# Altium PCB AP2-H.PcbDoc (part 2 of 4)
Units mm, origin at the board's own origin, x right, y up, seen from the top; angles counter-clockwise.
Board outline 380 x 190 mm, 2 copper layers (Top Layer, Bottom Layer); 519 components, 519 nets, 1666 pads, 438 vias.
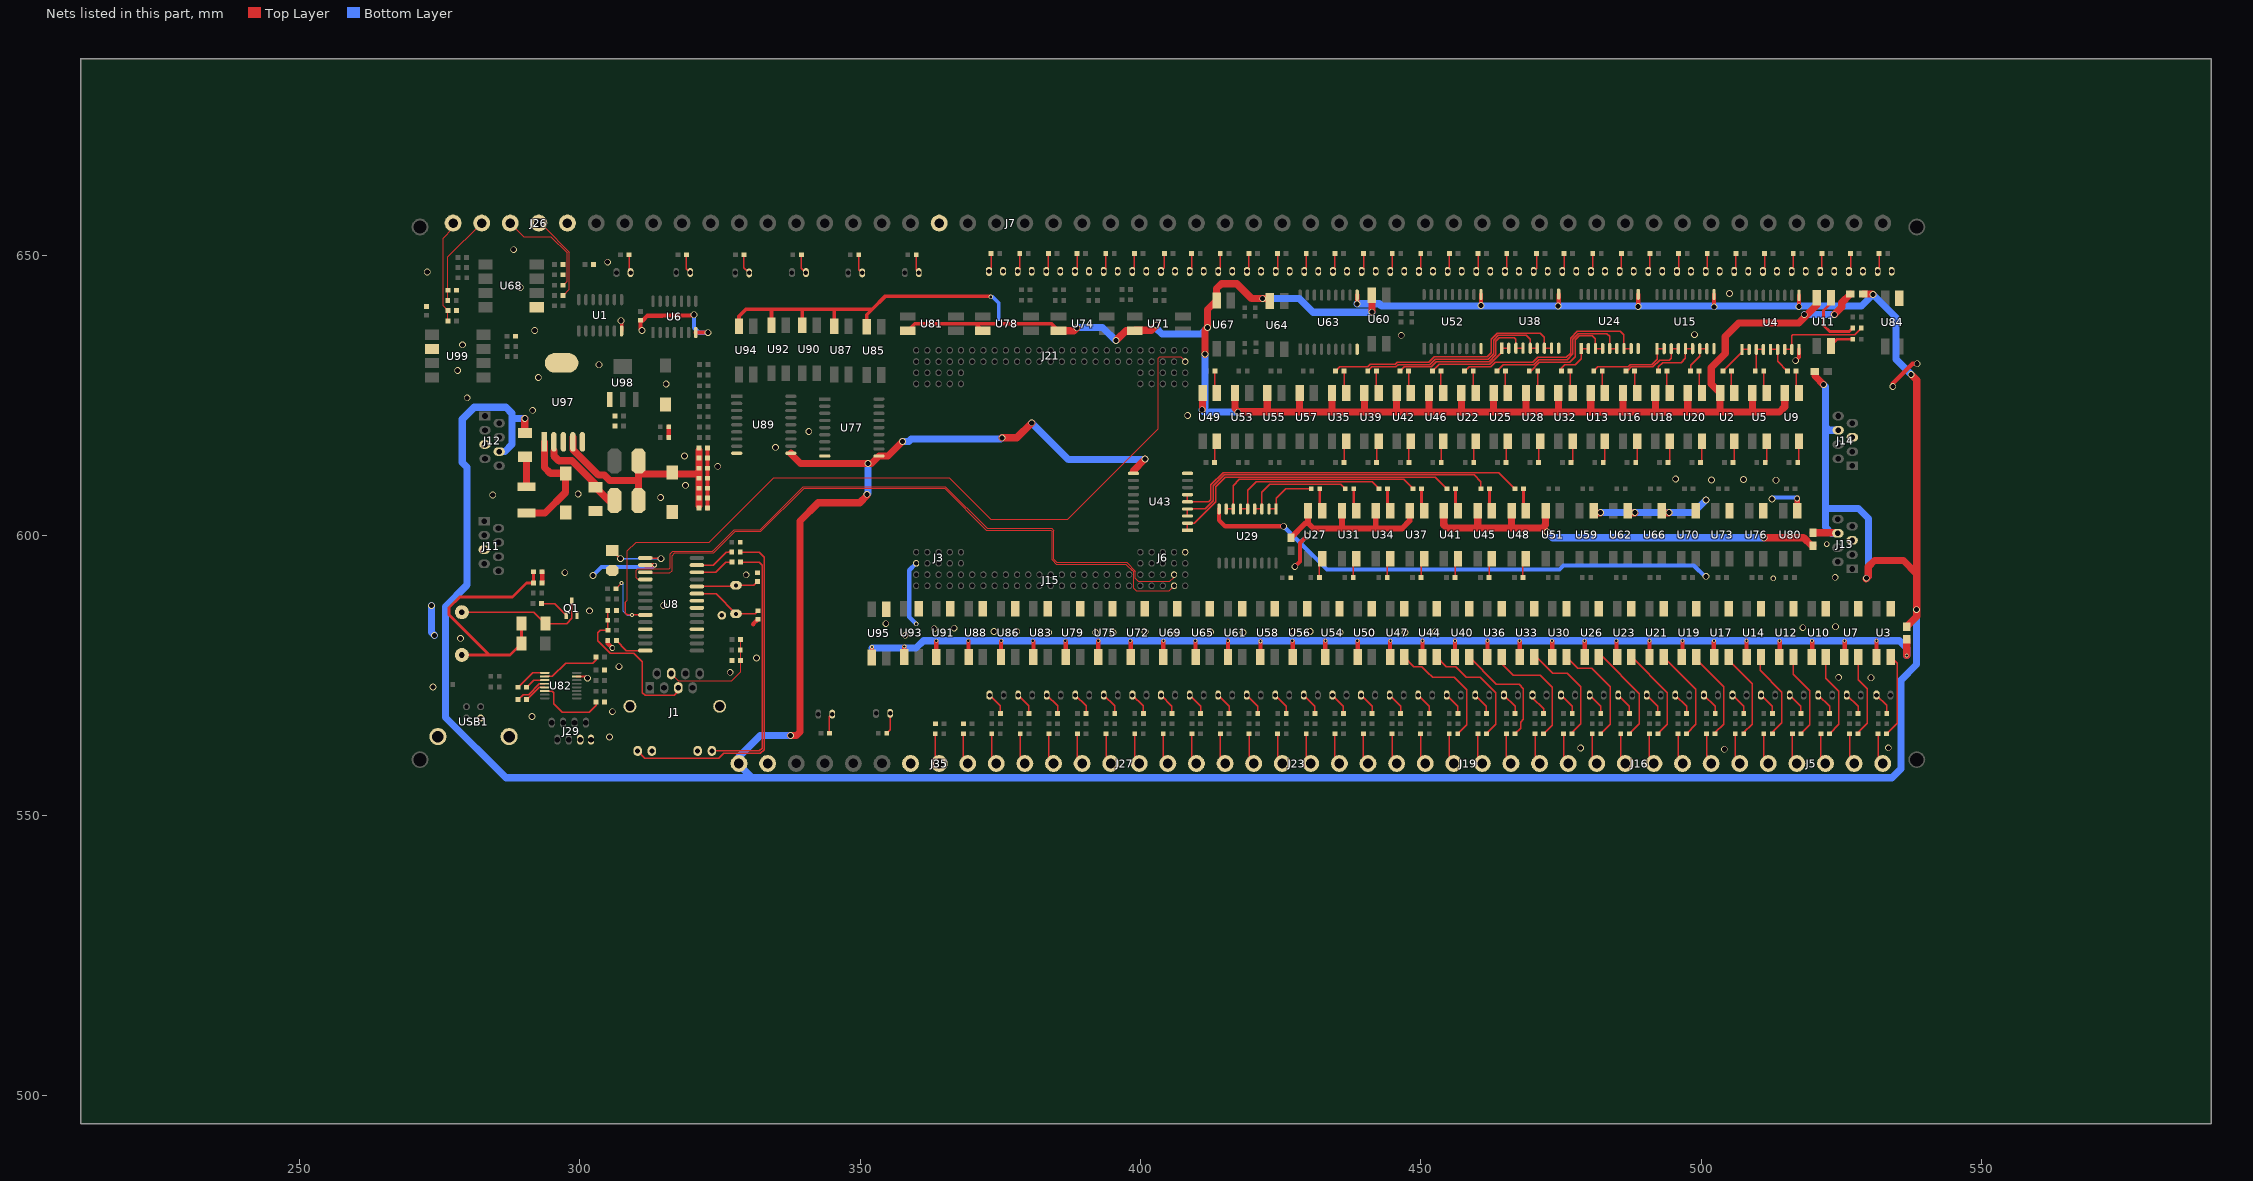
[diagram p2: the nets of this part, all layers, seen from the top]

## Via types
v1: diameter 0.7, hole 0.4, Top Layer to Bottom Layer, 204 vias
v2: diameter 1.2, hole 0.9, Top Layer to Bottom Layer, 160 vias
v3: diameter 1, hole 0.7, Top Layer to Bottom Layer, 38 vias
v4: diameter 0.8, hole 0.5, Top Layer to Bottom Layer, 14 vias
v5: diameter 3.556, hole 3.556, Top Layer to Bottom Layer, 10 vias
v6: diameter 2.3, hole 1.7, Top Layer to Bottom Layer, 8 vias
v7: diameter 1.1, hole 0.8, Top Layer to Bottom Layer, 2 vias
v8: diameter 2.8, hole 2.8, Top Layer to Bottom Layer, 2 vias

## Nets (pads, with @x,y where several pads share a name; then routed paths per layer and width w, separated by ;. In a path a pad name is that pad's centre, name@x,y a point inside that pad or via, vN(x,y) a via of type N, cw(c..) or ccw(c..) an arc to the next point about the centre after c; other vN are vias at no path point) (continued)
+24V: D4.A J12.6 J13.6 J14.6 J33.2 R5.2 R6.2 R100.2 R144.2 U4.10 U15.10 U24.10 U38.10 U43.10 U52.10 U63.10 U77.10 U89.10 | length 759.8
  Top Layer w0.762: v2@438.66,641.301 U63.10@438.66,642.85 ; v2(460.76,640.99) U52.10@460.76,642.95 ; v2@474.599,640.842 U38.10@474.599,643.024 ; v2(488.798,640.817) U24.10@488.798,642.974 ; U15.10@502.31,642.948 502.31,640.766 v2(502.336,640.766) ; v2(517.449,640.791) 517.474,640.766 U4.10@517.474,642.821
  Top Layer w1.27: D4.A@290.195,618.324 v2(290.195,620.827) ; v2(337.617,564.312) 338.658,564.312 339.293,564.947 339.293,602.564 342.546,605.817 349.953,605.817 351.231,607.095 v2(351.231,607.314) ; U89.10@337.65,614.64 337.617,614.607 339.39,612.833 v2(351.409,612.833) 352.043,612.833 U77.10@353.35,614.14 354.984,614.14 v2(357.579,616.735) ; v2(375.336,617.398) 377.952,617.398 v2(380.619,620.065) ; 398.898,611.378 398.75,611.526 v2(400.837,613.613) ; R100.2@519.963,600.456 524.307,600.456 J13.6@524.408,600.354 ; R144.2@520.319,629.209 520.319,628.421 v2(521.868,626.872) ; R5.2@528.93,643.026 530.606,643.026 v2(530.657,642.976) ; v2@529.438,592.261 529.826,592.65 529.826,594.393 530.962,595.528 536.092,595.528 538.48,593.141 ; R6.2@536.702,583.717 538.48,585.495 538.48,593.141 ; v2@537.667,628.523 538.48,627.71 538.48,593.141
  Bottom Layer w1.27: J12.6@285.623,614.934 286.639,614.934 287.884,616.179 287.884,620.827 ; v2(290.195,620.827) 287.884,620.827 ; v2@337.617,564.286 332.181,564.286 328.4,560.505 J33.2@328.4,559.3 328.4,559.076 330.708,556.768 ; v2(351.231,607.314) 351.409,607.492 v2(351.409,612.833) ; v2(357.579,616.735) 358.707,616.735 359.131,617.159 375.097,617.159 v2(375.336,617.398) ; v2(380.619,620.065) 387.186,613.498 v2@400.787,613.498 ; v2(438.658,641.299) 442.595,641.299 442.976,640.918 v2(474.523,640.918) 528.599,640.918 v2(530.657,642.976) 534.772,638.861 534.772,631.393 v2@537.312,628.853 ; v2(521.868,626.872) 522.173,626.567 522.173,619.404 ; J13.6@524.408,600.354 523.291,600.354 522.173,601.472 522.173,604.774 ; J14.6@524.459,618.744 522.834,618.744 522.173,619.404 ; v2(529.488,592.353) 529.869,592.734 529.869,603.021 528.117,604.774 522.173,604.774 ; v2(538.429,586.74) 538.455,586.715 538.455,576.936 535.661,574.142 535.661,558.368 534.06,556.768 330.708,556.768 ; 287.884,620.827 287.884,621.792 286.835,622.841 281.186,622.841 279.044,620.7 279.044,612.978 279.857,612.165 279.857,591.109 276.073,587.324 276.073,567.512 286.817,556.768 330.708,556.768 ; 522.173,604.774 522.173,619.404
  other v2: 537.489,628.675
CAN_H: C37.2 CAN.1 R270.1 | length 16.2
  Top Layer w0.16: R270.1@276.479,641.909 C37.2@276.479,643.712 276.479,649.656 CAN.1@282.473,655.65
CAN_L: C36.2 CAN.2 R269.1 | length 18.4
  Top Layer w0.16: R269.1@276.479,638.277 C36.2@276.479,640.08 275.641,640.918 275.641,653.009 277.373,654.741 CAN.2@277.373,655.65
CLKOUT: J15.48 U8.3 | length 115.5
  Top Layer w0.16: U8.3@311.7,593.415 311.819,593.296 316.078,593.296 316.491,593.71 316.491,596.392 316.965,596.866 323.849,596.866 323.874,596.89 323.907,596.89 327.722,600.705 332.325,600.705 340.002,608.382 365.073,608.382 372.537,600.918 384.052,600.918 384.246,600.724 384.246,595.619 384.985,594.88 397.396,594.88 398.805,593.471 ; 398.313,593.964 398.805,593.471 ; J15.48@406,591 405.123,590.123 399.258,590.123 398.805,590.575 398.805,593.471
CS: J21.50 R33.2 U8.9 | length 151.1
  Top Layer w0.16: R33.2@306.476,590.474 307.442,591.439 v1(307.442,591.49) ; 308.153,588.053 308.483,588.383 308.483,597.212 310.057,598.786 323.054,598.786 323.078,598.81 323.112,598.81 334.604,610.302 365.868,610.302 373.332,602.838 387.003,602.838 403.2,619.035 403.2,631.546 403.494,631.84 406.327,631.84 407.16,631.84 J21.50@408,631 J21.50@408,630.976
  Top Layer w0.254: 308.153,588.053 308.153,586.147 308.505,585.795 U8.9@311.7,585.795
  Bottom Layer w0.16: v1(307.442,591.49) 307.746,591.185 307.746,586.486 308.458,585.775 309.321,585.775 v1(309.296,585.8)
E+5V: C18.2 C19.2 C20.2 C21.2 C22.2 C23.2 C24.2 C32.1 L1.2 L2.1 U97.4 | length 43.5
  Top Layer w1.27: U97.4@298.76,616.682 U97.4@298.76,617.53 ; U97.4@298.78,616.682 298.78,615.264 303.309,610.736 304.375,610.736 305.333,609.778 310.5,609.778 ; L2.1@310.5,606.258 310.5,609.778 ; L1.2@310.5,613.248 310.5,609.778 ; 311.187,610.919 316.488,610.919 320.764,610.919 321.264,611.419 ; C18.2@321.264,605.231 321.264,607.719 321.264,609.619 321.264,611.419 ; C24.2@321.264,615.219 321.264,613.319 321.264,611.419
GND: C1.2 C2.2 C3.2 C4.2 C5.2 C6.2 C7.2 C8.1 C9.2 C12.2 C14.2 C15.2 C18.1 C19.1 C20.1 C21.1 C22.1 C23.1 C24.1 C25.2 C26.2 C27.2 C28.2 C29.2 C30.2 C31.2 C32.2 C33.2 C34.2 C36.1 C37.1 D3.A J1.10 J1.11 J1.13 J3.2 J6.9 J7.6 J11.5 J12.5 J13.5 J14.5 J26.3 J29.6 J29.8 J33.1 J35.1 LED7.K LED8.K LED9.K LED10.K LED11.K LED12.K LED13.K LED14.K LED21.K LED22.K LED23.K LED24.K LED25.K LED26.K LED27.K LED28.K LED35.K LED36.K LED37.K LED38.K LED45.K LED46.K LED47.K LED48.K LED55.K LED56.K LED57.K LED58.K LED59.K LED60.K LED61.K LED62.K pad.0 Q1.2 R40.2 R170.2 R265.2 R266.2 R271.2 U1.7 U3.3 U4.9 U6.7 U7.3 U8.2 U8.11 U8.18 U8.21 U8.22 U10.3 U12.3 U14.3 U15.9 U17.3 U19.3 U21.3 U23.3 U24.9 U26.3 U29.9 U30.3 U33.3 U36.3 U38.9 U40.3 U43.9 U44.3 U47.3 U50.3 U52.9 U54.3 U56.3 U58.3 U59.3 U61.3 U62.3 U63.9 U65.3 U66.3 U68.5 U69.3 U70.3 U72.3 U73.3 U75.3 U76.3 U77.9 U79.3 U80.3 U82.15 U83.3 U84.3 U86.3 U88.3 U89.9 U91.3 U93.3 U95.3 U97.3 U97.5 U97.6 U98.1 U99.2 USB1.4 USB1.5 USB1.6 | length 212.3
  Top Layer w0.203: J7.6@364.033,655.633 J7.6@364.1,655.7
  Top Layer w0.254: J35.1@358.37,559.93 J35.1@359,559.3
  Top Layer w0.381: U82.15@299.45,574.825 301.069,574.825 v2(301.371,574.523)
  Top Layer w0.635: v2(307.34,638.277) 307.453,638.163 U1.7@307.453,636.457 ; v2(516.89,631.165) 517.474,631.749 U4.9@517.474,633.171 ; U80.3@517.144,604.443 U80.3@517.187,604.4
  Top Layer w0.762: C14.2@293.294,591.515 C15.2@293.294,593.515 ; R40.2@305,581.25 305,580.723 v3(305.816,579.907) ; v2(311.099,636.524) 310.82,636.803 C1.2@310.82,638.378 311.277,638.378 312.101,639.202 312.115,639.189 314.706,639.189 314.719,639.202 v2@320.396,639.202 ; U8.2@311.7,594.685 v4(313.355,594.685) ; C27.2@315.874,617.468 C28.2@315.874,619.368 ; U6.7@320.687,636.177 322.85,636.177 v2(322.885,636.143) ; C18.1@322.788,604.85 322.788,607.719 322.788,609.619 322.788,611.419 322.788,613.319 C24.1@322.788,615.219 ; 330.924,584.162 C7.2@331.8,585.038 ; U29.9@414.04,604.7 414.04,602.697 415.112,601.624 v2(425.552,601.624) ; v2(427.543,594.421) 428.473,595.351 428.473,598.627 v2(429.743,599.897) ; v2(534.213,626.542) 534.213,627.086 537.733,630.606 v2(538.556,630.606)
  Top Layer w1.016: U80.3@517.144,604.443 v3(517.144,606.577)
  Top Layer w1.27: U59.3@480.867,604.4 481.255,604.012 v2@482.099,604.012 ; U62.3@486.92,604.4 487.359,603.961 v2@488.188,603.961 ; U66.3@493.59,604.012 v2@494.284,604.012
  Bottom Layer w0.762: v2(302.362,592.836) 303.886,594.36 313.03,594.36 v4(313.355,594.685) ; v2(320.396,639.343) 320.396,637.032 321.285,636.143 v2(322.885,636.143) ; J3.2@360,595 358.775,593.775 358.775,585.445 v4(360.02,584.2) ; v2(425.552,601.624) 428.498,598.678 ; v2(429.743,599.897) 428.523,598.678 428.498,598.678 ; v2@500.774,592.569 498.704,594.639 475.488,594.639 474.751,593.903 433.273,593.903 428.498,598.678 ; v2@512.724,606.74 516.981,606.74 v3(517.144,606.577)
  Bottom Layer w1.27: v2(273.558,587.451) 273.558,582.676 v2(274.066,582.168) ; v2(482.099,604.063) v2(488.188,604.063) 498.627,604.063 v2(500.888,606.323)
  other v2: 504.165,561.848 478.536,562.051 533.4,562.102 305.308,564.032 291.465,567.69 305.816,568.554 273.812,572.948 530.301,574.599 524.561,574.675 326.822,575.564 306.984,576.58 331.521,578.104 278.74,581.635 358.038,582.168 383.642,582.676 392.024,582.676 395.122,582.676 418.287,582.676 435.585,582.676 441.198,582.676 447.192,582.676 406.4,582.727 412.496,582.778 400.812,582.803 452.628,582.803 373.888,582.828 377.952,582.828 427.228,582.828 430.276,582.828 363.22,583.336 366.776,583.438 518.16,583.54 523.977,583.692 354.584,584.251 301.752,586.537 314.96,587.502 523.926,592.506 500.888,592.684 329.692,592.963 297.332,593.344 494.309,604.063 512.648,606.476 314.427,606.755 284.48,607.187 299.72,607.365 318.846,608.914 513.359,609.829 501.853,609.879 507.568,609.956 495.478,610.057 324.612,612.318 318.694,614.172 334.924,615.696 340.868,618.541 408.432,621.36 291.592,622.3 279.908,624.535 315.417,626.999 292.608,628.142 278.232,629.412 303.428,630.428 279.07,633.984 446.532,635.686 498.856,635.787 291.973,636.524 505.079,643.128 289.408,644.195 272.796,646.989 304.978,648.716 288.214,650.951
  other v3: 512.877,592.328 522.427,598.424
INPUT1: J5.1 R9.2 | length 5.6
  Top Layer w0.254: R9.2@531.576,564.6 531.576,560.124 J5.1@532.4,559.3
INPUT2: J5.2 R13.2 | length 5.6
  Top Layer w0.254: R13.2@526.499,564.6 526.499,560.101 J5.2@527.3,559.3
INPUT3: J5.3 R29.2 | length 5.6
  Top Layer w0.254: R29.2@521.398,564.6 521.398,560.102 J5.3@522.2,559.3
INPUT4: J5.4 R34.2 | length 5.6
  Top Layer w0.254: R34.2@516.298,564.6 516.298,560.102 J5.4@517.1,559.3
INPUT5: J5.5 R39.2 | length 5.6
  Top Layer w0.254: R39.2@511.197,564.6 511.197,560.103 J5.5@512,559.3
INPUT6: J5.6 R44.2 | length 5.6
  Top Layer w0.254: R44.2@506.096,564.6 506.096,560.104 J5.6@506.9,559.3
INPUT7: J16.1 R52.2 | length 5.6
  Top Layer w0.254: R52.2@500.995,564.6 500.995,560.105 J16.1@501.8,559.3
INPUT8: J16.2 R56.2 | length 5.6
  Top Layer w0.254: R56.2@495.895,564.6 495.895,560.105 J16.2@496.7,559.3
INPUT9: J16.3 R66.2 | length 5.6
  Top Layer w0.254: R66.2@490.794,564.6 490.794,560.106 J16.3@491.6,559.3
INPUT10: J16.4 R70.2 | length 5.6
  Top Layer w0.254: R70.2@485.693,564.6 485.693,560.107 J16.4@486.5,559.3
INPUT11: J16.5 R81.2 | length 5.6
  Top Layer w0.254: R81.2@480.592,564.6 480.592,560.108 J16.5@481.4,559.3
INPUT12: J16.6 R87.2 | length 5.6
  Top Layer w0.254: R87.2@475.491,564.6 475.491,560.109 J16.6@476.3,559.3
INPUT13: J19.1 R93.2 | length 5.6
  Top Layer w0.254: R93.2@470.391,564.6 470.391,560.109 J19.1@471.2,559.3
INPUT14: J19.2 R99.2 | length 5.6
  Top Layer w0.254: R99.2@465.29,564.6 465.29,560.11 J19.2@466.1,559.3
INPUT15: J19.3 R110.2 | length 5.6
  Top Layer w0.254: R110.2@460.189,564.6 460.189,560.111 J19.3@461,559.3
INPUT16: J19.4 R122.2 | length 5.6
  Top Layer w0.254: R122.2@455.088,564.6 455.088,560.112 J19.4@455.9,559.3
INPUT17: J19.5 R128.2 | length 5.6
  Top Layer w0.254: R128.2@449.988,564.6 449.988,560.112 J19.5@450.8,559.3
INPUT18: J19.6 R134.2 | length 5.6
  Top Layer w0.254: R134.2@444.887,564.6 444.887,560.113 J19.6@445.7,559.3
INPUT19: J23.1 R142.2 | length 5.6
  Top Layer w0.254: R142.2@439.786,564.6 439.786,560.114 J23.1@440.6,559.3
INPUT20: J23.2 R147.2 | length 5.6
  Top Layer w0.254: R147.2@434.685,564.6 434.685,560.115 J23.2@435.5,559.3
INPUT21: J23.3 R159.2 | length 5.6
  Top Layer w0.254: R159.2@429.584,564.6 429.584,560.116 J23.3@430.4,559.3
INPUT22: J23.4 R165.2 | length 5.6
  Top Layer w0.254: R165.2@424.484,564.6 424.484,560.116 J23.4@425.3,559.3
INPUT23: J23.5 R177.2 | length 5.6
  Top Layer w0.254: R177.2@419.383,564.6 419.383,560.117 J23.5@420.2,559.3
INPUT24: J23.6 R188.2 | length 5.6
  Top Layer w0.254: R188.2@414.282,564.6 414.282,560.118 J23.6@415.1,559.3
INPUT25: J27.1 R194.2 | length 5.6
  Top Layer w0.254: R194.2@409.181,564.6 409.181,560.119 J27.1@410,559.3
INPUT26: J27.2 R200.2 | length 5.6
  Top Layer w0.254: R200.2@404.081,564.6 404.081,560.119 J27.2@404.9,559.3
INPUT27: J27.3 R216.2 | length 5.6
  Top Layer w0.254: R216.2@398.98,564.6 398.98,560.12 J27.3@399.8,559.3
INPUT28: J27.4 R224.2 | length 5.6
  Top Layer w0.254: R224.2@393.879,564.6 393.879,560.121 J27.4@394.7,559.3
INPUT29: J27.5 R228.2 | length 5.6
  Top Layer w0.254: R228.2@388.778,564.6 388.778,560.122 J27.5@389.6,559.3
INPUT30: J27.6 R232.2 | length 5.6
  Top Layer w0.254: R232.2@383.678,564.6 383.678,560.122 J27.6@384.5,559.3
INPUT31: J31.1 R240.2 | length 5.6
  Top Layer w0.254: R240.2@378.577,564.6 378.577,560.123 J31.1@379.4,559.3
INPUT32: J31.2 R246.2 | length 5.6
  Top Layer w0.254: R246.2@373.476,564.6 373.476,560.124 J31.2@374.3,559.3
INT: J15.47 U8.4 | length 118.1
  Top Layer w0.16: U8.4@311.7,592.145 310.343,592.145 310.083,592.405 310.083,593.801 310.312,594.03 315.976,594.03 316.171,594.225 316.171,596.736 316.62,597.186 323.716,597.186 323.741,597.21 323.775,597.21 327.589,601.025 332.185,601.025 332.188,601.027 ; 332.195,601.027 339.87,608.702 365.205,608.702 372.669,601.238 384.185,601.238 384.566,600.857 384.566,595.751 385.118,595.2 397.529,595.2 399.125,593.604 399.125,592.328 399.613,591.84 405.277,591.84 406,592.563 J15.47@406,593
LEDA: J1.9 R21.2 | length 62.9
  Top Layer w0.254: J1.9@310.325,561.55 311.627,560.248 324.83,560.248 325.7,561.118 332.229,561.118 332.867,561.756 332.867,561.782 332.933,561.848 332.933,596.093 331.999,597.027 328.878,597.027 R21.2@328.624,597.281
LEDB: J1.12 R22.2 | length 46
  Top Layer w0.254: J1.12@323.574,561.55 332.05,561.55 332.519,562.019 332.519,594.683 331.978,595.224 328.802,595.224 R22.2@328.624,595.401
NetC2_1: C2.1 J1.4 R1.1 R2.2 | length 20
  Top Layer w0.16: J1.4@316.31,575.34 317.594,574.056 327.092,574.056 328.7,575.664 C2.1@328.7,577.647 R1.1@328.7,581.447
  Top Layer w0.254: J1.4@316.31,575.34 J1.4@316.803,575.34 ; R2.2@328.624,579.547 R2.2@328.7,579.623
NetC3_1: C3.1 J1.5 R3.1 R4.2 | length 29.6
  Top Layer w0.254: C3.1@305,586.7 305,584.9 305.024,584.876 R3.1@305.024,583.075 303.675,583.075 303.2,582.6 303.2,581.209 305.409,579 309.6,579 311.151,577.449 311.151,571.965 311.656,571.461 316.821,571.461 317.58,572.22 J1.5@317.58,572.8
NetC5_1: C5.1 U8.1 | length 11.9
  Top Layer w0.254: C5.1@305.8,597.281 307.248,595.833 v2(307.264,595.833) ; U8.1@311.7,595.955 v2@314.356,595.955
  Bottom Layer w0.254: v2(307.264,595.833) v2(314.477,595.833)
NetC6_1: C6.1 U8.24 Y1.2 | length 11.2
  Top Layer w0.254: U8.24@320.9,590.875 327.604,590.875 327.863,591.134 331.064,591.134 C6.1@331.724,591.795
NetC7_1: C7.1 U8.23 Y1.1 | length 12.6
  Top Layer w0.254: U8.23@320.9,589.605 324.312,589.605 327.863,586.054 331.292,586.054 C7.1@331.8,586.562
NetC9_1: C9.1 U82.6 | length 13
  Top Layer w0.254: U82.6@293.75,572.225 295.075,572.225 295.357,571.943 295.357,569.943 296.848,568.452 301.676,568.452 302.9,569.676 C9.1@302.9,570.3
NetC10_1: C10.1 U82.5 | length 4
  Top Layer w0.254: C10.1@290.5,571 290.9,571 292.775,572.875 U82.5@293.75,572.875
NetC10_2: C10.2 U82.4 | length 5.9
  Top Layer w0.254: C10.2@288.976,570.7 289.876,571.6 290.889,571.6 292.814,573.525 U82.4@293.75,573.525
NetC11_1: C11.1 U82.2 | length 10.9
  Top Layer w0.254: U82.2@293.75,574.825 295.095,574.825 297.459,577.19 302.29,577.19 302.9,577.8 C11.1@302.9,578.283
NetC13_1: C13.1 U82.1 | length 5.8
  Top Layer w0.254: C13.1@289,572.9 291.575,575.475 U82.1@293.75,575.475
NetC13_2: C13.2 U82.3 | length 3.8
  Top Layer w0.254: C13.2@290.524,572.9 291.799,574.175 U82.3@293.75,574.175
NetC14_1: C14.1 C15.1 D1.K D2.K U96.2 | length 45.4
  Top Layer w0.508: U96.2@278.968,578.663 283.845,578.663 ; D2.K@289.615,584.252 289.615,580.696 D1.K@289.59,580.671 287.582,578.663 283.845,578.663 ; C15.1@291.77,593.515 C14.1@291.77,591.515 290.5,591.515 288.011,589.026 278.587,589.026 276.669,587.108 276.669,585.839 283.845,578.663
NetC34_1: C34.1 F1.2 U97.1 | length 20.7
  Top Layer w1.27: F1.2@290.474,603.987 293.776,603.987 297.485,607.695 C34.1@297.485,611.068 294.747,611.068 293.7,612.115 U97.1@293.7,616.682
NetD2_A: D2.A Q1.3 U96.1 | length 23.9
  Top Layer w0.254: U96.1@279.298,586.283 291.835,586.283 D2.A@293.865,584.252 297.638,584.252 298.577,585.191 Q1.3@298.577,588.289
  Top Layer w0.508: U96.1@278.968,586.283 U96.1@279.298,586.283
NetD3_K: D3.K L2.2 U97.2 | length 15.3
  Top Layer w1.27: U97.2@295.373,615.087 295.373,614.201 296.262,613.312 298.615,613.312 302.805,609.122 D3.K@302.805,608.578 305.175,606.208 L2.2@306.16,606.208
NetD4_K: D4.K F1.1 | length 5.4
  Top Layer w1.27: D4.K@290.245,614.024 290.474,613.794 F1.1@290.474,608.686
NetJ26_1: J26.1 R180.2 | length 18.8
  Top Layer w0.16: R180.2@296.732,644.601 R180.2@297.053,644.601
  Top Layer w0.203: J26.1@287.602,655.702 290.015,653.288 294.869,653.288 297.764,650.392 297.764,645.312 R180.2@297.053,644.601
NetJ26_2: J26.2 R184.2 | length 16.4
  Top Layer w0.203: J26.2@292.6,655.6 292.6,654.953 293.718,654.953 298.163,650.507 298.163,643.908 R184.2@297.028,642.772
  Top Layer w0.254: R184.2@297.104,642.772 R184.2@297.205,642.671
NetJ35_2: J35.2 R262.1 | length 5.6
  Top Layer w0.254: R262.1@363.406,564.6 363.406,559.994 J35.2@364.1,559.3
NetJ35_3: J35.3 R263.1 | length 5.6
  Top Layer w0.254: R263.1@368.441,564.6 368.441,560.059 J35.3@369.2,559.3
NetLED1_A: LED1.A R15.2 | length 4.1
  Top Layer w0.254: LED1.A@531.3,571.5 533.124,569.676 R15.2@533.124,568.2
NetLED2_A: LED2.A R16.2 | length 4.1
  Top Layer w0.254: LED2.A@526,571.5 528.024,569.476 R16.2@528.024,568.2
NetLED3_A: LED3.A R17.2 | length 4.1
  Top Layer w0.254: LED3.A@520.906,571.5 522.924,569.482 R17.2@522.924,568.2
NetLED4_A: LED4.A R18.2 | length 4.1
  Top Layer w0.254: LED4.A@515.81,571.5 517.824,569.486 R18.2@517.824,568.2
NetLED5_A: LED5.A R19.2 | length 4.1
  Top Layer w0.254: LED5.A@510.713,571.5 512.724,569.489 R19.2@512.724,568.2
NetLED6_A: LED6.A R20.2 | length 4.1
  Top Layer w0.254: LED6.A@505.616,571.5 507.624,569.492 R20.2@507.624,568.2
NetLED7_A: LED7.A R25.2 | length 3.3
  Top Layer w0.254: LED7.A@531.5,647.1 531.776,647.376 R25.2@531.776,650.3
NetLED8_A: LED8.A R26.2 | length 3.3
  Top Layer w0.254: LED8.A@526.387,647.1 526.666,647.379 R26.2@526.666,650.3
NetLED9_A: LED9.A R27.2 | length 3.3
  Top Layer w0.254: LED9.A@521.274,647.1 521.557,647.382 R27.2@521.557,650.3
NetLED10_A: LED10.A R28.2 | length 3.3
  Top Layer w0.254: LED10.A@516.161,647.1 516.447,647.386 R28.2@516.447,650.3
NetLED11_A: LED11.A R46.2 | length 3.3
  Top Layer w0.254: LED11.A@511.048,647.1 511.337,647.389 R46.2@511.337,650.3
NetLED12_A: LED12.A R47.2 | length 3.3
  Top Layer w0.254: LED12.A@505.935,647.1 506.228,647.392 R47.2@506.228,650.3
NetLED13_A: LED13.A R48.2 | length 3.7
  Top Layer w0.254: LED13.A@500.823,647.1 501.118,647.395 R48.2@501.118,650.3 R48.2@500.823,650.005
NetLED14_A: LED14.A R49.2 | length 3.3
  Top Layer w0.254: R49.2@495.71,650.001 R49.2@496.008,650.3 LED14.A@496.008,647.399
NetLED15_A: LED15.A R58.2 | length 4.1
  Top Layer w0.254: LED15.A@500.519,571.5 502.524,569.495 R58.2@502.524,568.2
NetLED16_A: LED16.A R59.2 | length 4.1
  Top Layer w0.254: LED16.A@495.423,571.5 497.424,569.499 R59.2@497.424,568.2
NetLED17_A: LED17.A R60.2 | length 4.1
  Top Layer w0.254: LED17.A@490.326,571.5 492.324,569.502 R60.2@492.324,568.2
NetLED18_A: LED18.A R61.2 | length 4.1
  Top Layer w0.254: LED18.A@485.229,571.5 487.224,569.505 R61.2@487.224,568.2
NetLED19_A: LED19.A R62.2 | length 4.1
  Top Layer w0.254: LED19.A@480.132,571.5 482.124,569.508 R62.2@482.124,568.2
NetLED20_A: LED20.A R63.2 | length 4.1
  Top Layer w0.254: LED20.A@475.035,571.5 477.024,569.511 R63.2@477.024,568.2
NetLED21_A: LED21.A R75.2 | length 3.8
  Top Layer w0.254: LED21.A@490.597,647.1 490.899,647.402 R75.2@490.899,650.3 R75.2@490.597,649.998
NetLED22_A: LED22.A R76.2 | length 3.8
  Top Layer w0.254: LED22.A@485.484,647.1 485.789,647.405 R76.2@485.789,650.3 R76.2@485.484,649.995
NetLED23_A: LED23.A R77.2 | length 3.3
  Top Layer w0.254: LED23.A@480.371,647.1 480.679,647.408 R77.2@480.679,650.3
NetLED24_A: LED24.A R78.2 | length 3.3
  Top Layer w0.254: LED24.A@475.258,647.1 475.57,647.411 R78.2@475.57,650.3
NetLED25_A: LED25.A R107.2 | length 3.3
  Top Layer w0.254: LED25.A@454.806,647.1 455.131,647.424 R107.2@455.131,650.3
NetLED26_A: LED26.A R104.2 | length 3.4
  Top Layer w0.254: LED26.A@470.145,647.1 470.676,647.631 R104.2@470.676,650.3
NetLED27_A: LED27.A R105.2 | length 3.3
  Top Layer w0.254: LED27.A@465.032,647.1 465.35,647.418 R105.2@465.35,650.3
NetLED28_A: LED28.A R106.2 | length 3.3
  Top Layer w0.254: LED28.A@459.919,647.1 460.241,647.421 R106.2@460.241,650.3
NetLED29_A: LED29.A R111.2 | length 4.1
  Top Layer w0.254: LED29.A@469.939,571.5 469.939,571.061 471.924,569.076 R111.2@471.924,568.2
NetLED30_A: LED30.A R112.2 | length 4.1
  Top Layer w0.254: LED30.A@464.842,571.5 466.824,569.518 R112.2@466.824,568.2
NetLED31_A: LED31.A R114.2 | length 4.1
  Top Layer w0.254: LED31.A@454.648,571.5 456.624,569.524 R114.2@456.624,568.2
NetLED32_A: LED32.A R113.2 | length 4.1
  Top Layer w0.254: LED32.A@459.745,571.5 461.724,569.521 R113.2@461.724,568.2
NetLED33_A: LED33.A R115.2 | length 4.1
  Top Layer w0.254: LED33.A@449.552,571.5 451.524,569.528 R115.2@451.524,568.2
NetLED34_A: LED34.A R116.2 | length 4.1
  Top Layer w0.254: LED34.A@444.455,571.5 446.424,569.531 R116.2@446.424,568.2
NetLED35_A: LED35.A R139.2 | length 3.3
  Top Layer w0.254: LED35.A@434.355,647.1 434.692,647.437 R139.2@434.692,650.3
NetLED36_A: LED36.A R136.2 | length 3.3
  Top Layer w0.254: LED36.A@449.694,647.1 450.021,647.428 R136.2@450.021,650.3
NetLED37_A: LED37.A R137.2 | length 2.9
  Top Layer w0.254: LED37.A@444.911,647.431 R137.2@444.911,650.3
NetLED38_A: LED38.A R138.2 | length 3.3
  Top Layer w0.254: LED38.A@439.468,647.1 439.802,647.434 R138.2@439.802,650.3
NetLED39_A: LED39.A R151.2 | length 4.1
  Top Layer w0.254: LED39.A@439.358,571.5 441.324,569.534 R151.2@441.324,568.2
NetLED40_A: LED40.A R152.2 | length 4.1
  Top Layer w0.254: LED40.A@434.261,571.5 436.224,569.537 R152.2@436.224,568.2
NetLED41_A: LED41.A R153.2 | length 4.1
  Top Layer w0.254: LED41.A@429.165,571.5 431.124,569.541 R153.2@431.124,568.2
NetLED42_A: LED42.A R154.2 | length 4.1
  Top Layer w0.254: LED42.A@424.068,571.5 426.024,569.544 R154.2@426.024,568.2
NetLED43_A: LED43.A R155.2 | length 4.1
  Top Layer w0.254: LED43.A@418.971,571.5 420.924,569.547 R155.2@420.924,568.2
NetLED44_A: LED44.A R156.2 | length 4.1
  Top Layer w0.254: LED44.A@413.874,571.5 415.824,569.55 R156.2@415.824,568.2
NetLED45_A: LED45.A R176.2 | length 3.3
  Top Layer w0.254: LED45.A@413.903,647.1 414.253,647.45 R176.2@414.253,650.3
NetLED46_A: LED46.A R173.2 | length 3.3
  Top Layer w0.254: LED46.A@429.242,647.1 429.582,647.441 R173.2@429.582,650.3
NetLED47_A: LED47.A R174.2 | length 3.3
  Top Layer w0.254: LED47.A@424.129,647.1 424.473,647.444 R174.2@424.473,650.3
NetLED48_A: LED48.A R175.2 | length 3.3
  Top Layer w0.254: LED48.A@419.016,647.1 419.363,647.447 R175.2@419.363,650.3
NetLED49_A: LED49.A R204.2 | length 4.1
  Top Layer w0.254: LED49.A@408.777,571.5 410.724,569.553 R204.2@410.724,568.2
NetLED50_A: LED50.A R205.2 | length 4.1
  Top Layer w0.254: LED50.A@403.681,571.5 405.624,569.557 R205.2@405.624,568.2
NetLED51_A: LED51.A R207.2 | length 4.1
  Top Layer w0.254: LED51.A@393.487,571.5 395.424,569.563 R207.2@395.424,568.2
NetLED52_A: LED52.A R206.2 | length 4.1
  Top Layer w0.254: LED52.A@398.584,571.5 400.524,569.56 R206.2@400.524,568.2
NetLED53_A: LED53.A R208.2 | length 4.1
  Top Layer w0.254: LED53.A@388.39,571.5 390.324,569.566 R208.2@390.324,568.2
NetLED54_A: LED54.A R209.2 | length 4.1
  Top Layer w0.254: LED54.A@383.294,571.5 385.224,569.57 R209.2@385.224,568.2
NetLED55_A: LED55.A R215.2 | length 3.4
  Top Layer w0.254: LED55.A@393.452,647.1 393.815,647.463 R215.2@393.815,650.3
NetLED56_A: LED56.A R212.2 | length 3.3
  Top Layer w0.254: LED56.A@408.79,647.1 409.144,647.453 R212.2@409.144,650.3
NetLED57_A: LED57.A R213.2 | length 3.4
  Top Layer w0.254: LED57.A@403.677,647.1 404.276,647.699 R213.2@404.276,650.3
NetLED58_A: LED58.A R214.2 | length 3.3
  Top Layer w0.254: LED58.A@398.565,647.1 398.924,647.46 R214.2@398.924,650.3
NetLED59_A: LED59.A R235.2 | length 3.4
  Top Layer w0.254: LED59.A@383.226,647.1 383.595,647.47 R235.2@383.595,650.3
NetLED60_A: LED60.A R237.2 | length 3.4
  Top Layer w0.254: LED60.A@373,647.1 373.376,647.476 R237.2@373.376,650.3
NetLED61_A: LED61.A R234.2 | length 3.4
  Top Layer w0.254: LED61.A@388.339,647.1 388.705,647.466 R234.2@388.705,650.3
NetLED62_A: LED62.A R236.2 | length 3.4
  Top Layer w0.254: LED62.A@378.113,647.1 378.486,647.473 R236.2@378.486,650.3
NetLED63_A: LED63.A R242.2 | length 4.1
  Top Layer w0.254: LED63.A@378.197,571.5 380.124,569.573 R242.2@380.124,568.2
NetLED64_A: LED64.A R243.2 | length 4.1
  Top Layer w0.254: LED64.A@373.1,571.5 375.024,569.576 R243.2@375.024,568.2
NetLED65_K: LED65.K R253.1 | length 3.4
  Top Layer w0.254: R253.1@360.02,650.062 360.02,647.33 LED65.K@360.488,646.862
NetLED66_K: LED66.K R254.1 | length 3.5
  Top Layer w0.254: R254.1@349.773,650.062 349.773,647.416 LED66.K@350.378,646.811
NetLED67_K: LED67.K R255.1 | length 3.3
  Top Layer w0.254: R255.1@308.788,650.062 308.788,647.131 LED67.K@309.057,646.862
NetLED68_K: LED68.K R256.1 | length 3.4
  Top Layer w0.254: R256.1@319.034,650.062 319.034,647.548 LED68.K@319.695,646.887
NetLED69_K: LED69.K R257.1 | length 3.6
  Top Layer w0.254: R257.1@329.281,650.062 329.281,647.741 LED69.K@330.211,646.811
NetLED70_K: LED70.K R258.1 | length 3.5
  Top Layer w0.254: R258.1@339.527,650.062 339.527,647.68 LED70.K@340.345,646.862
NetLED71_K: LED71.K R259.1 | length 3.6
  Top Layer w0.254: R259.1@344.526,564.693 344.526,567.603 LED71.K@345.044,568.122
NetLED72_K: LED72.K R260.1 | length 3.8
  Top Layer w0.254: R260.1@354.762,564.693 355.357,565.288 LED72.K@355.357,568.249
NetQ1_1: Q1.1 R249.2 | length 5.3
  Top Layer w0.254: R249.2@293.2,587.822 295.539,587.822 Q1.1@297.612,585.749
NetR5_1: R5.1 U2.4 U5.4 U9.4 U11.4 U13.4 U16.4 U18.4 U20.4 U22.4 U25.4 U28.4 U32.4 U35.4 U39.4 U42.4 U46.4 U49.4 U53.4 U55.4 U57.4 U60.4 U64.4 U67.4 U71.4 U74.4 U78.4 U81.4 U85.4 U87.4 U90.4 U92.4 U94.4 | length 390
  Top Layer w0.635: U94.4@328.4,637.3 328.4,639.093 329.641,640.334 352.171,640.334 ; U92.4@334.2,637.5 334.2,639.991 ; U90.4@339.7,637.5 339.7,640.08 ; U87.4@345.4,637.3 345.4,640.091 ; U85.4@351.18,637.22 351.18,639.343 352.171,640.334 ; U81.4@358.5,636.5 359.743,637.743 370.657,637.743 ; U78.4@371.9,636.5 370.657,637.743 ; v4@373.304,642.609 354.446,642.609 352.171,640.334 ; U74.4@385.4,636.5 384.157,637.743 v2(374.752,637.743) 370.657,637.743
  Top Layer w1.27: U85.4@351.18,637.22 U85.4@351.2,637.2 ; U74.4@385.4,636.5 388.164,636.5 v2(388.671,637.007) ; v2@395.872,634.962 397.41,636.5 U71.4@399,636.5 399.086,636.586 401.941,636.586 v2(402.844,637.489) ; v2@411.1,622.479 U49.4@411.1,625.4 ; v2(411.505,632.308) 411.491,632.322 411.491,636.561 v2(411.987,637.056) 411.987,640.287 U67.4@413.6,641.9 413.6,644.003 414.477,644.881 417.195,644.881 419.862,642.214 v2(421.818,642.214) 422.686,642.214 U64.4@423.1,641.8 ; U53.4@416.868,625.4 416.868,622.652 417.484,622.037 422.637,622.037 U55.4@422.637,625.4 ; 422.674,622 486.089,622 ; 428.405,622.005 U57.4@428.405,625.4 ; 434.174,622.126 U35.4@434.174,625.4 ; 439.942,622.342 U39.4@439.942,625.4 ; v2@441.3,639.826 U60.4@441.3,642.8 ; 445.711,622.068 U42.4@445.711,625.4 ; 451.479,622.221 U46.4@451.479,625.4 ; 457.247,622.147 U22.4@457.247,625.4 ; 463.016,622.184 U25.4@463.016,625.4 ; 468.784,622.016 U28.4@468.784,625.4 ; 474.553,622.347 U32.4@474.553,625.4 ; 480.321,622.021 U13.4@480.321,625.4 ; U16.4@486.089,625.4 486.089,622 ; U18.4@491.858,625.4 491.858,622 ; U20.4@497.626,625.4 497.626,622 ; 503.395,622.2 U2.4@503.395,625.4 501.828,626.967 501.828,629.945 504.317,632.435 504.317,635.457 506.73,637.87 517.423,637.87 520.649,641.096 U11.4@520.649,642.386 ; U5.4@509.163,625.4 509.163,622 ; U9.4@514.932,625.4 514.932,622.932 513.999,622 509.163,622 ; v2(523.773,639.369) 525.107,640.702 525.107,641.49 R5.1@526.644,643.026 ; 486.089,622 491.858,622 ; 491.858,622 497.626,622 ; 497.626,622 509.163,622
  Bottom Layer w0.635: v4(373.304,642.519) 373.684,642.519 374.752,641.452 v2(374.752,637.743)
  Bottom Layer w1.27: v2(388.671,637.007) 388.747,637.083 393.268,637.083 v2@395.618,634.733 ; v2(402.844,637.489) 402.844,636.93 403.86,635.914 410.845,635.914 v2(411.987,637.056) ; v2(411.505,632.308) 411.505,622.884 v2(411.023,622.402) 411.455,621.97 v2(417.373,621.97) ; v2(421.818,642.214) 428.371,642.214 430.784,639.801 v2(441.274,639.801) ; v2@518.49,639.369 v2(523.773,639.369)
  other v2: 395.63,634.746 518.414,639.369
NetR6_1: R6.1 U3.1 U7.1 U10.1 U12.1 U14.1 U17.1 U19.1 U21.1 U23.1 U26.1 U30.1 U33.1 U36.1 U40.1 U44.1 U47.1 U50.1 U54.1 U56.1 U58.1 U61.1 U65.1 U69.1 U72.1 U75.1 U79.1 U83.1 U86.1 U88.1 U91.1 U93.1 U95.1 | length 278.8
  Top Layer w0.203: U95.1@352.1,578.2 U95.1@352.1,578.327
  Top Layer w0.762: U95.1@352.12,578.327 v1(352.12,580.085) ; U93.1@357.886,578.314 v1(357.886,580.187) ; U91.1@363.568,578.3 v1@363.568,581.168 ; U88.1@369.352,578.3 v1@369.352,581.148 ; U86.1@375.135,578.3 v1@375.135,581.135 ; U83.1@380.919,578.3 v1@380.919,581.081 ; U79.1@386.703,578.3 v1@386.703,581.097 ; U75.1@392.487,578.3 v1@392.487,581.187 ; U72.1@398.271,578.3 v1@398.271,581.129 ; U69.1@404.055,578.3 v1@404.055,581.155 ; U65.1@409.839,578.3 v1@409.839,581.161 ; U61.1@415.623,578.3 v1@415.623,581.177 ; U58.1@421.406,578.3 v1(421.406,581.094) ; U56.1@427.19,578.3 v1@427.19,581.11 ; U54.1@432.974,578.3 v1@432.974,581.174 ; U50.1@438.758,578.3 v1@438.758,581.142 ; U47.1@444.542,578.3 v1@444.542,581.142 ; U44.1@450.326,578.3 v1@450.326,581.174 ; U40.1@456.11,578.3 v1@456.11,581.19 ; U36.1@461.894,578.3 v1@461.894,581.194 ; U33.1@467.677,578.3 v1@467.677,581.123 ; U30.1@473.461,578.3 v1@473.461,581.139 ; U26.1@479.245,578.3 v1@479.245,581.155 ; U23.1@484.929,578.3 v1@484.929,581.071 ; U21.1@490.813,578.3 v1@490.813,581.187 ; U19.1@496.697,578.3 v1@496.697,581.097 ; U17.1@502.281,578.3 v1@502.281,581.019 ; U14.1@508.1,578.364 v1(508.1,581.2) ; U12.1@514.048,578.3 v1@514.048,581.148 ; U10.1@519.832,578.3 v1@519.832,581.132 ; U7.1@525.616,578.3 v1@525.616,581.116 ; U3.1@531.3,578.3 v1(531.3,581.2)
  Top Layer w1.27: v1(536.702,578.561) R6.1@536.702,581.431
  Bottom Layer w1.27: v1@352.12,579.902 359.989,579.902 361.287,581.2 v1(363.6,581.2) v1(369.3,581.2) v1(375.2,581.2) v1(380.8,581.2) v1(386.6,581.2) v1(392.5,581.2) v1(398.2,581.2) v1(404.1,581.2) v1(409.8,581.2) v1(415.6,581.2) v1(427.1,581.2) v1(433,581.2) v1(438.7,581.2) v1(444.6,581.2) v1(450.3,581.2) v1(456.1,581.2) v1(461.9,581.2) v1(467.6,581.2) v1(473.4,581.2) v1(479.2,581.2) v1(484.9,581.2) v1(490.8,581.2) v1(496.7,581.2) v1(502.3,581.2) v1(508.1,581.2) v1(514,581.2) v1(519.8,581.2) v1(525.6,581.2) v1(531.3,581.2) 535.409,581.2 536.702,579.907 v1(536.702,578.561)
NetR7_2: R7.2 U2.2 | length 3.9
  Top Layer w0.254: R7.2@505.687,613 505.935,613.248 U2.2@505.935,616.8
NetR8_1: R8.1 U2.3 | length 4.1
  Top Layer w0.254: R8.1@505.426,629.3 505.426,625.908 U2.3@505.935,625.4
NetR8_2: R8.2 U4.1 U4.2 | length 6.1
  Top Layer w0.254: R8.2@503.902,629.3 U4.1@507.314,632.712 ; U4.1@507.314,633.171 U4.2@508.584,633.171
NetR9_1: R9.1 U3.2 | length 15
  Top Layer w0.254: R9.1@533.1,564.6 535,566.5 535,577.14 U3.2@533.84,578.3
NetR11_2: R11.2 U5.2 | length 3.9
  Top Layer w0.254: R11.2@511.466,613 511.703,613.237 U5.2@511.703,616.8
NetR12_1: R12.1 U5.3 | length 4.1
  Top Layer w0.254: R12.1@511.184,629.3 511.184,625.919 U5.3@511.703,625.4
NetR12_2: R12.2 U4.3 U4.4 | length 5.2
  Top Layer w0.254: R12.2@509.66,629.3 509.854,629.494 U4.3@509.854,633.171 U4.4@511.124,633.171
NetR13_1: R13.1 U7.2 | length 15
  Top Layer w0.254: R13.1@528.023,564.6 528.023,564.853 529.61,566.44 529.61,572.674 528.056,574.228 U7.2@528.056,578.3
NetR21_1: R21.1 U8.27 | length 6.9
  Top Layer w0.254: U8.27@320.9,594.685 323.853,594.685 326.17,597.002 326.619,597.002 R21.1@326.771,597.154
NetR22_1: R22.1 U8.26 | length 6.9
  Top Layer w0.254: U8.26@320.9,593.415 324.215,593.415 325.998,595.198 326.873,595.198 R22.1@327.025,595.351
NetR23_2: R23.2 U9.2 | length 3.9
  Top Layer w0.254: R23.2@517.245,613 517.472,613.226 U9.2@517.472,616.8
NetR24_1: R24.1 U9.3 | length 4.1
  Top Layer w0.254: R24.1@516.942,629.3 516.942,625.929 U9.3@517.472,625.4
NetR24_2: R24.2 U4.5 U4.6 | length 5.9
  Top Layer w0.254: U4.5@512.394,633.171 U4.6@513.664,633.171 513.664,631.054 R24.2@515.418,629.3
NetR29_1: R29.1 U10.2 | length 14.4
  Top Layer w0.254: U10.2@522.272,577.3 522.272,574.5 524.6,572.172 524.6,566.278 R29.1@522.922,564.6
NetR31_2: R31.2 U11.2 | length 4.3
  Top Layer w0.508: U11.2@523.189,633.913 524.251,634.975 R31.2@527.05,634.975
NetR32_1: R32.1 U11.3 | length 11.5
  Top Layer w0.508: U11.3@523.189,642.513 523.189,641.426 521.868,640.105 521.868,637.438 522.961,636.346 526.44,636.346 R32.1@527.05,636.956
NetR32_2: R32.2 U4.7 U4.8 | length 16.9
  Top Layer w0.254: U4.7@514.934,633.171 U4.8@516.204,633.171 516.204,635.61 516.4,635.805 527.423,635.805 R32.2@528.574,636.956 R32.2@528.574,636.702
NetR34_1: R34.1 U12.2 | length 16.1
  Top Layer w0.254: U12.2@516.488,577.414 U12.2@516.488,577.9 ; U12.2@516.488,578.3 U12.2@516.488,577.9 ; R34.1@517.822,564.6 519.41,566.188 519.41,572.257 516.488,575.178 U12.2@516.488,577.9
NetR37_2: R37.2 U13.2 | length 3.9
  Top Layer w0.254: R37.2@482.571,613 482.861,613.29 U13.2@482.861,616.8
NetR38_1: R38.1 U13.3 | length 3.4
  Top Layer w0.254: U13.3@482.395,625.866 R38.1@482.395,629.3
NetR38_2: R38.2 U15.1 U15.2 | length 15.3
  Top Layer w0.254: R38.2@480.871,629.3 481.607,630.037 486.984,630.037 487.416,630.468 491.24,630.468 492.15,631.379 U15.1@492.15,633.298 U15.2@493.42,633.298
NetR39_1: R39.1 U14.2 | length 14.6
  Top Layer w0.254: U14.2@510.552,576.952 510.552,575.907 514.41,572.05 514.41,566.54 512.721,564.851 R39.1@512.721,564.6
NetR40_1: R40.1 U8.14 | length 5.9
  Top Layer w0.254: R40.1@306.524,581.25 308.329,579.445 U8.14@311.7,579.445
NetR42_2: R42.2 U16.2 | length 3.9
  Top Layer w0.254: R42.2@488.35,613 488.629,613.279 U16.2@488.629,616.8
NetR43_1: R43.1 U16.3 | length 3.4
  Top Layer w0.254: U16.3@488.153,625.877 R43.1@488.153,629.3
NetR43_2: R43.2 U15.3 U15.4 | length 12
  Top Layer w0.254: R43.2@486.629,629.3 486.858,629.3 487.595,630.037 491.429,630.037 492.615,631.223 494.317,631.223 494.69,631.596 U15.3@494.69,633.298 U15.4@495.96,633.298
NetR44_1: R44.1 U17.2 | length 16.5
  Top Layer w0.254: U17.2@505.332,578.3 U17.2@504.921,578.3 504.921,577.679 509.107,573.493 509.107,566.337 507.62,564.85 R44.1@507.62,564.6
NetR50_2: R50.2 U18.2 | length 3.9
  Top Layer w0.254: R50.2@494.129,613 494.398,613.269 U18.2@494.398,616.8
NetR51_1: R51.1 U18.3 | length 3.4
  Top Layer w0.254: U18.3@493.911,625.887 R51.1@493.911,629.3
NetR51_2: R51.2 U15.5 U15.6 | length 9.2
  Top Layer w0.254: R51.2@492.387,629.3 492.387,630.055 493.141,630.809 496.443,630.809 497.23,631.596 U15.5@497.23,633.298 U15.6@498.5,633.298
NetR52_1: R52.1 U19.2 | length 16.8
  Top Layer w0.254: U19.2@499.137,577.163 499.137,577.9 U19.2@499.137,578.3 ; U19.2@499.337,577.7 504.01,573.027 504.01,566.34 502.519,564.849 R52.1@502.519,564.6
NetR54_2: R54.2 U20.2 | length 3.9
  Top Layer w0.254: R54.2@499.908,613 500.166,613.258 U20.2@500.166,616.8
NetR55_1: R55.1 U20.3 | length 3.4
  Top Layer w0.254: U20.3@499.668,625.898 R55.1@499.668,629.3
NetR55_2: R55.2 U15.7 U15.8 | length 6
  Top Layer w0.254: R55.2@498.144,629.408 R55.2@498.144,629.3 498.144,630.301 499.77,631.927 U15.7@499.77,633.298 U15.8@501.04,633.298
NetR56_1: R56.1 U21.2 | length 17.3
  Top Layer w0.254: U21.2@493.353,577.447 U21.2@493.353,578.3 ; U21.2@493.553,578.1 499.1,572.553 499.1,566.281 R56.1@497.419,564.6
NetR64_2: R64.2 U22.2 | length 3.9
  Top Layer w0.254: R64.2@459.456,613 459.456,616.468 U22.2@459.787,616.8
NetR65_1: R65.1 U22.3 | length 3.5
  Top Layer w0.254: U22.3@459.363,625.824 R65.1@459.363,629.3
NetR65_2: R65.2 U24.7 U24.8 | length 37.2
  Top Layer w0.254: R65.2@457.839,629.3 458.639,630.1 462.5,630.1 463.3,630.9 470.014,630.9 470.842,631.728 ; 470.661,631.548 470.842,631.728 ; 470.877,631.764 470.859,631.746 ; U24.8@487.528,633.324 U24.7@486.258,633.324 486.258,635.787 485.633,636.412 477.964,636.412 476.743,635.191 476.743,632.519 475.952,631.728 471.22,631.728 471.202,631.746 470.859,631.746 ; 470.842,631.728 470.859,631.746
NetR66_1: R66.1 U23.2 | length 17.1
  Top Layer w0.254: U23.2@487.569,578.3 487.6,578.3 494,571.9 494,566.282 R66.1@492.318,564.6
NetR68_2: R68.2 U25.2 | length 3.9
  Top Layer w0.254: R68.2@465.235,613 465.235,616.479 U25.2@465.556,616.8
NetR69_1: R69.1 U25.3 | length 3.5
  Top Layer w0.254: U25.3@465.121,625.835 R69.1@465.121,629.3
NetR69_2: R69.2 U24.5 U24.6 | length 28.6
  Top Layer w0.254: R69.2@463.597,629.3 464.765,630.468 470.167,630.468 471.013,631.314 ; 470.697,630.998 471.013,631.314 ; 471.031,631.332 471.013,631.314 ; U24.6@484.988,633.324 U24.5@483.718,633.324 483.718,635.483 483.202,635.998 478.136,635.998 477.157,635.019 477.157,632.348 476.123,631.314 471.013,631.314
NetR70_1: R70.1 U26.2 | length 18.1
  Top Layer w0.254: U26.2@482.1,578.3 U26.2@481.785,578.3 482.448,578.3 489,571.748 489,566.383 R70.1@487.217,564.6
NetR71_1: R71.1 U27.4 U31.4 U34.4 U37.4 | length 33.8
  Top Layer w1.016: R71.1@426.847,599.567 429.458,602.178 429.9,602.178 ; U27.4@429.9,604.4 429.9,602.178 ; U31.4@435.953,604.4 435.953,601.358 435.813,601.218 ; U34.4@442.007,604.4 442.007,601.417 441.808,601.218 ; U37.4@448.06,604.4 448.06,602.619 446.659,601.218 441.808,601.218 ; 429.9,602.178 430.86,601.218 435.813,601.218 ; 435.813,601.218 441.808,601.218
NetR73_2: R73.2 U27.2 | length 3.5
  Top Layer w0.254: R73.2@431.924,592.5 431.924,595.284 U27.2@432.44,595.8
NetR74_1: R74.1 U27.3 | length 4.1
  Top Layer w0.508: R74.1@432,608.3 432,604.84 U27.3@432.44,604.4
NetR74_2: R74.2 U29.1 U29.2 | length 10.2
  Top Layer w0.254: U29.2@422.93,604.7 U29.1@424.2,604.7 424.2,606.6 425.9,608.3 R74.2@430.476,608.3
NetR79_2: R79.2 U28.2 | length 3.9
  Top Layer w0.254: R79.2@471.013,613 471.013,616.489 U28.2@471.324,616.8
NetR80_1: R80.1 U28.3 | length 3.5
  Top Layer w0.254: U28.3@470.879,625.845 R80.1@470.879,629.3
NetR80_2: R80.2 U24.3 U24.4 | length 19.4
  Top Layer w0.254: R80.2@469.355,629.3 469.584,629.3 471.184,630.9 476.595,630.9 477.571,631.876 477.571,634.848 478.307,635.584 480.619,635.584 481.178,635.025 U24.3@481.178,633.324 U24.4@482.448,633.324
NetR81_1: R81.1 U30.2 | length 19.4
  Top Layer w0.254: U30.2@476.3,578.3 U30.2@476.001,578.3 478.001,576.3 480.489,576.3 482.389,574.4 482.4,574.4 483.8,573 483.8,566.284 R81.1@482.116,564.6
NetR83_2: R83.2 U31.2 | length 3.5
  Top Layer w0.254: R83.2@437.976,592.5 437.976,595.282 U31.2@438.493,595.8
NetR84_1: R84.1 U31.3 | length 4.1
  Top Layer w0.508: R84.1@438.053,608.3 438.053,604.84 U31.3@438.493,604.4
NetR84_2: R84.2 U29.3 U29.4 | length 20
  Top Layer w0.254: U29.4@420.39,604.7 U29.3@421.66,604.7 421.66,607.66 423.1,609.1 435.729,609.1 R84.2@436.529,608.3
NetR85_2: R85.2 U32.2 | length 3.9
  Top Layer w0.254: R85.2@476.792,613 477.093,613.3 U32.2@477.093,616.8
NetR86_1: R86.1 U32.3 | length 3.4
  Top Layer w0.254: U32.3@476.637,625.856 R86.1@476.637,629.3
NetR86_2: R86.2 U24.1 U24.2 | length 7.8
  Top Layer w0.254: R86.2@475.113,629.3 475.113,629.813 475.728,630.428 477.545,630.428 478.638,631.52 U24.1@478.638,633.324 U24.2@479.908,633.324
NetR87_1: R87.1 U33.2 | length 19.1
  Top Layer w0.254: U33.2@470.636,578.3 473.568,575.368 476.17,575.368 478.526,573.013 478.526,566.356 477.015,564.845 R87.1@477.015,564.6
NetR89_2: R89.2 U34.2 | length 3.5
  Top Layer w0.254: R89.2@444.027,592.5 444.027,595.281 U34.2@444.547,595.8
NetR90_1: R90.1 U34.3 | length 4.1
  Top Layer w0.508: R90.1@444.107,608.3 444.107,604.84 U34.3@444.547,604.4
NetR90_2: R90.2 U29.5 U29.6 | length 29.2
  Top Layer w0.254: U29.6@417.85,604.7 U29.5@419.12,604.7 419.12,608.02 420.632,609.532 441.351,609.532 R90.2@442.583,608.3
NetR91_2: R91.2 U35.2 | length 4
  Top Layer w0.254: R91.2@436.34,613 436.34,616.426 U35.2@436.714,616.8
NetR92_1: R92.1 U35.3 | length 3.5
  Top Layer w0.254: U35.3@436.332,625.782 R92.1@436.332,629.3
NetR92_2: R92.2 U38.7 U38.8 | length 45
  Top Layer w0.254: R92.2@434.808,629.3 435.58,630.073 440.573,630.073 441,630.5 445.421,630.5 445.822,630.9 448.763,630.9 451.165,630.9 451.458,630.9 452.385,631.827 461.885,631.827 462.595,632.537 462.595,634.987 463.69,636.082 471.333,636.082 472.059,635.356 U38.7@472.059,633.374 U38.8@473.329,633.374
NetR93_1: R93.1 U36.2 | length 19.9
  Top Layer w0.254: U36.2@464.434,577.066 466.5,575 471.3,575 471.832,574.468 472.897,573.403 473.429,572.871 473.429,566.115 R93.1@471.915,564.6 ; U36.2@464.434,578.066 U36.2@464.434,578.3
NetR95_2: R95.2 U37.2 | length 3.5
  Top Layer w0.254: R95.2@450.079,592.5 450.079,595.279 U37.2@450.6,595.8
NetR96_1: R96.1 U37.3 | length 4.1
  Top Layer w0.508: R96.1@450.16,608.3 450.16,604.84 U37.3@450.6,604.4
NetR96_2: R96.2 U29.7 U29.8 | length 38.8
  Top Layer w0.254: U29.8@415.31,604.7 U29.7@416.58,604.7 416.58,608.88 417.664,609.964 436.999,609.964 ; 436.868,609.964 436.999,609.964 ; R96.2@448.636,608.3 446.972,609.964 436.999,609.964
NetR97_2: R97.2 U39.2 | length 4
  Top Layer w0.254: R97.2@442.119,613 442.119,616.437 U39.2@442.482,616.8
NetR98_1: R98.1 U39.3 | length 3.5
  Top Layer w0.254: U39.3@442.089,625.793 R98.1@442.089,629.3
NetR98_2: R98.2 U38.5 U38.6 | length 36.2
  Top Layer w0.254: R98.2@440.565,629.3 441.302,630.037 445.569,630.037 446,630.468 448.584,630.468 451.344,630.468 451.637,630.468 452.564,631.395 462.039,631.395 463.009,632.365 463.009,634.816 463.861,635.668 468.851,635.668 469.519,635 U38.5@469.519,633.374 U38.6@470.789,633.374
NetR99_1: R99.1 U40.2 | length 20.8
  Top Layer w0.254: U40.2@458.7,578.3 U40.2@458.65,578.3 463.491,573.459 467.541,573.459 468.321,572.679 468.321,567.16 467.8,566.64 467.8,565.586 R99.1@466.814,564.6
NetR100_1: R100.1 U41.4 U45.4 U48.4 U51.4 | length 79.2
  Top Layer w1.27: U41.4@454.113,604.4 454.113,601.887 454.7,601.3 471.7,601.3 472.273,601.873 U51.4@472.273,604.4 ; 460.167,601.333 U45.4@460.167,604.4 ; 466.22,601.38 U48.4@466.22,604.4 ; 471.825,601.3 v2(472.516,600.608) ; v2(511.226,599.567) 518.312,599.567 519.709,598.17 R100.1@519.963,598.17
  Bottom Layer w1.27: v2(472.516,600.608) 473.558,599.567 v2(511.226,599.567)
NetR102_2: R102.2 U41.2 | length 3.5
  Top Layer w0.254: R102.2@456.131,592.5 456.131,595.278 U41.2@456.653,595.8
NetR103_1: R103.1 U41.3 | length 4.1
  Top Layer w0.508: R103.1@456.213,608.3 456.213,604.84 U41.3@456.653,604.4
NetR103_2: R103.2 U43.1 U43.2 | length 53.4
  Top Layer w0.254: U43.1@408.4,600.9 U43.2@408.4,602.17 409.587,602.17 413.435,606.018 413.435,608.679 415.134,610.378 452.612,610.378 R103.2@454.689,608.3
NetR108_2: R108.2 U42.2 | length 3.9
  Top Layer w0.254: R108.2@447.898,613 447.898,616.447 U42.2@448.251,616.8
NetR109_1: R109.1 U42.3 | length 3.5
  Top Layer w0.254: U42.3@447.847,625.803 R109.1@447.847,629.3
NetR109_2: R109.2 U38.3 U38.4 | length 27.5
  Top Layer w0.254: R109.2@446.323,629.3 447.06,630.037 448.405,630.037 451.523,630.036 451.837,630.037 452.764,630.964 462.193,630.964 463.423,632.194 463.423,634.644 464.033,635.254 466.7,635.254 466.979,634.975 U38.3@466.979,633.374 U38.4@468.249,633.374
NetR110_1: R110.1 U44.2 | length 21.2
  Top Layer w0.254: U44.2@452.866,578.3 454.596,576.57 456.23,576.57 458.145,574.655 460.645,574.655 463.4,571.9 463.4,566.287 R110.1@461.713,564.6
NetR118_2: R118.2 U45.2 | length 3.5
  Top Layer w0.254: R118.2@462.183,592.5 462.183,595.276 U45.2@462.707,595.8
NetR119_1: R119.1 U45.3 | length 4.1
  Top Layer w0.508: R119.1@462.267,608.3 462.267,604.84 U45.3@462.707,604.4
NetR119_2: R119.2 U43.3 U43.4 | length 59.5
  Top Layer w0.254: U43.3@408.4,603.44 U43.4@408.4,604.71 411.542,604.71 413.003,606.172 413.003,608.832 414.963,610.792 459.508,610.792 460.743,609.557 R119.2@460.743,608.3
NetR120_2: R120.2 U46.2 | length 3.9
  Top Layer w0.254: R120.2@453.677,613 453.677,616.458 U46.2@454.019,616.8
NetR121_1: R121.1 U46.3 | length 3.5
  Top Layer w0.254: U46.3@453.605,625.814 R121.1@453.605,629.3
NetR121_2: R121.2 U38.1 U38.2 | length 15.8
  Top Layer w0.254: R121.2@452.081,629.3 453.313,630.532 462.346,630.532 464.439,632.624 U38.1@464.439,633.374 U38.2@465.709,633.374
NetR122_1: R122.1 U47.2 | length 22.5
  Top Layer w0.254: U47.2@447.082,578.3 448.787,576.595 450.205,576.595 451.205,575.595 452.145,574.655 455.987,574.655 ; 455.5,574.655 455.987,574.655 ; R122.1@456.612,564.6 458.2,566.188 458.2,572.443 455.987,574.655
NetR124_2: R124.2 U48.2 | length 3.5
  Top Layer w0.254: R124.2@468.234,592.5 468.234,595.274 U48.2@468.76,595.8
NetR125_1: R125.1 U48.3 | length 4.1
  Top Layer w0.508: R125.1@468.32,608.3 468.32,604.84 U48.3@468.76,604.4
NetR125_2: R125.2 U43.5 U43.6 | length 64.6
  Top Layer w0.254: U43.6@408.4,607.25 U43.5@408.4,605.98 412.18,605.98 412.572,606.372 412.572,608.986 414.791,611.206 463.89,611.206 R125.2@466.796,608.3
NetR126_2: R126.2 U49.2 | length 4
  Top Layer w0.254: R126.2@413.224,613 413.224,616.384 U49.2@413.64,616.8
NetR127_1: R127.1 U49.3 | length 3.6
  Top Layer w0.254: U49.3@413.3,625.74 R127.1@413.3,629.3